# Altium PCB Final_handPCB_2022-03-14.pcbdoc
Units mil, origin at the board's own origin, x right, y up, seen from the top; angles counter-clockwise.
Board outline 4490 x 3865 mil, 2 copper layers (Top Layer, Bottom Layer); 36 components, 34 nets, 147 pads, 52 vias.
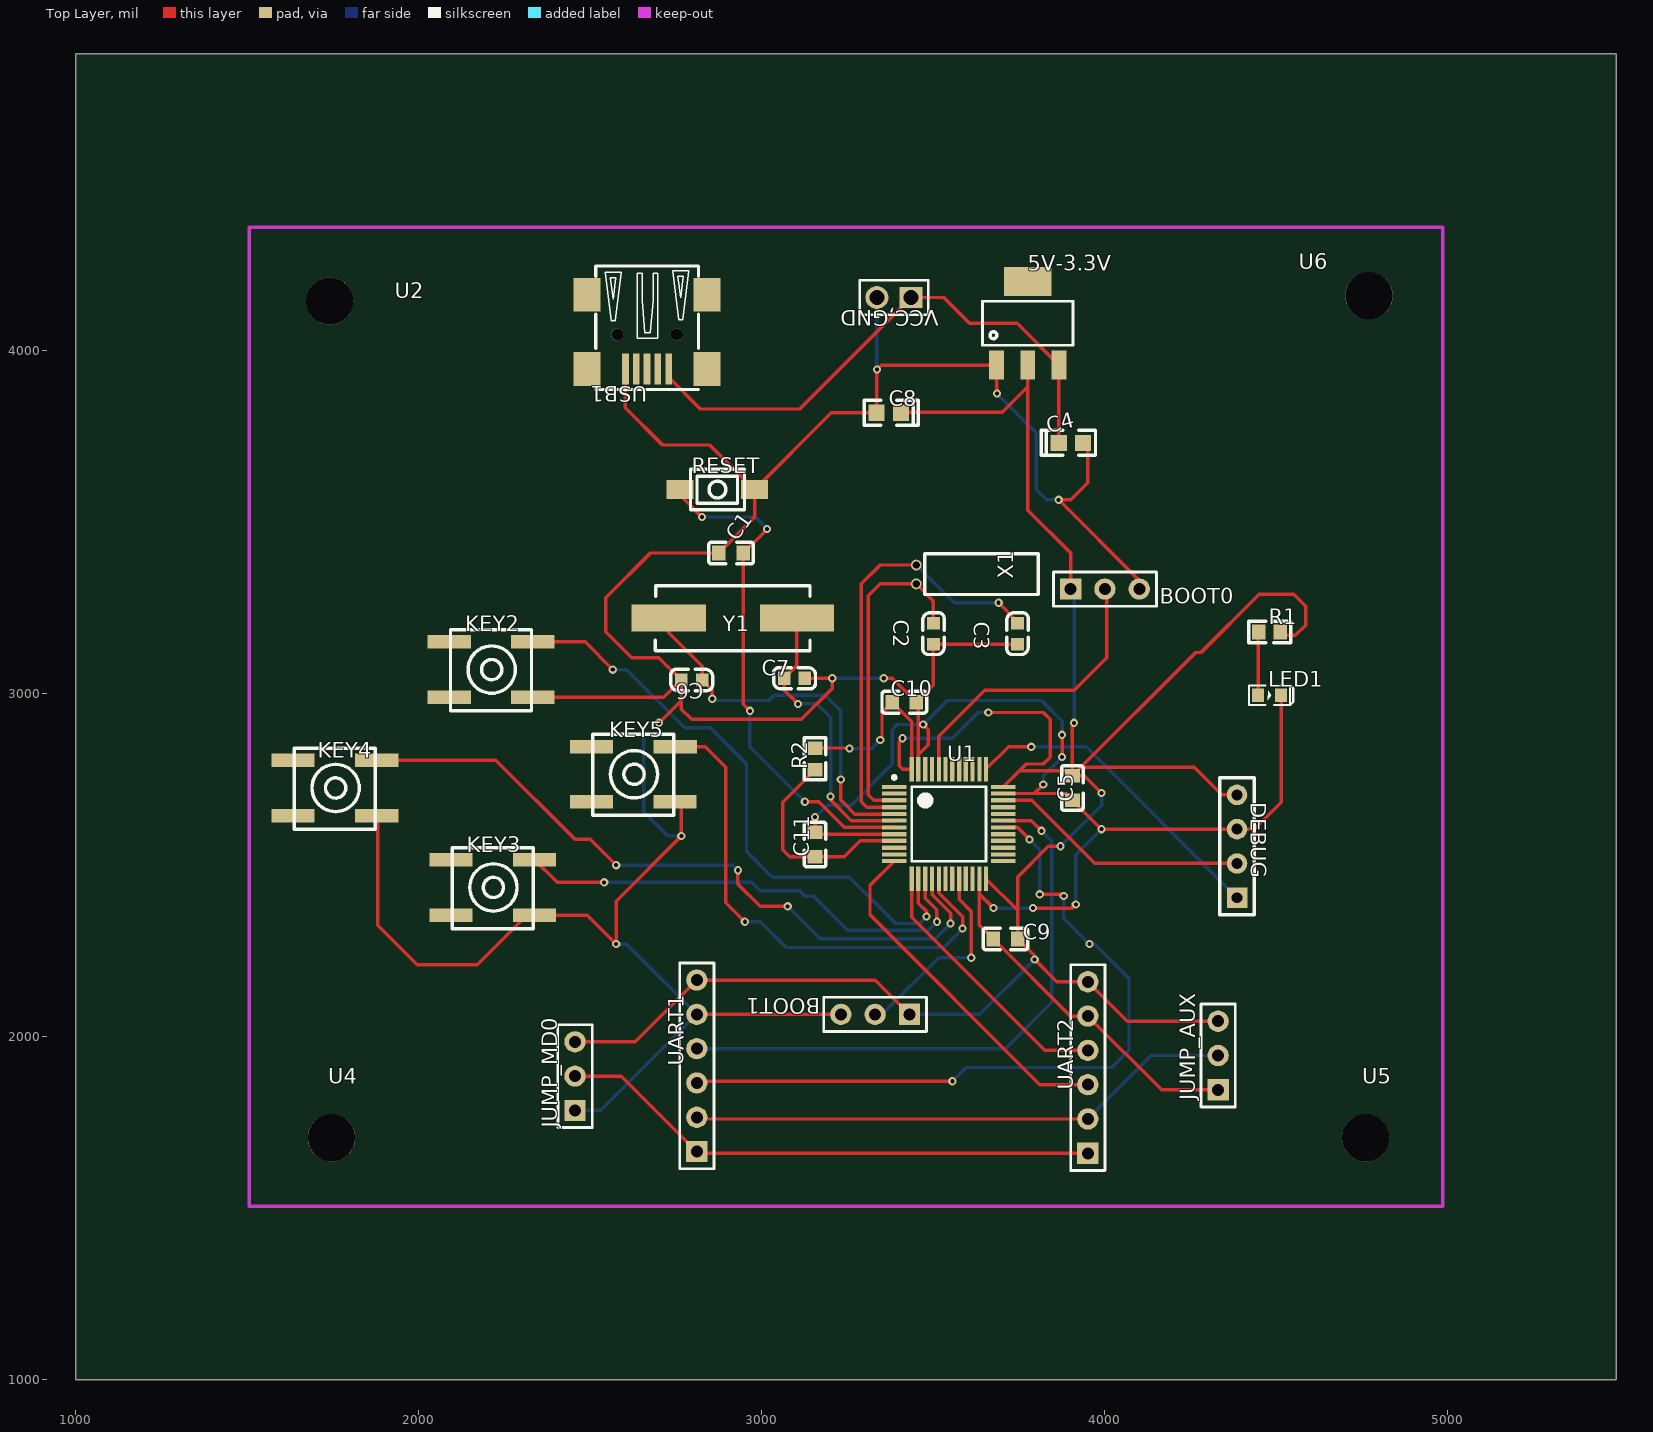
[diagram p0: Top Layer view]
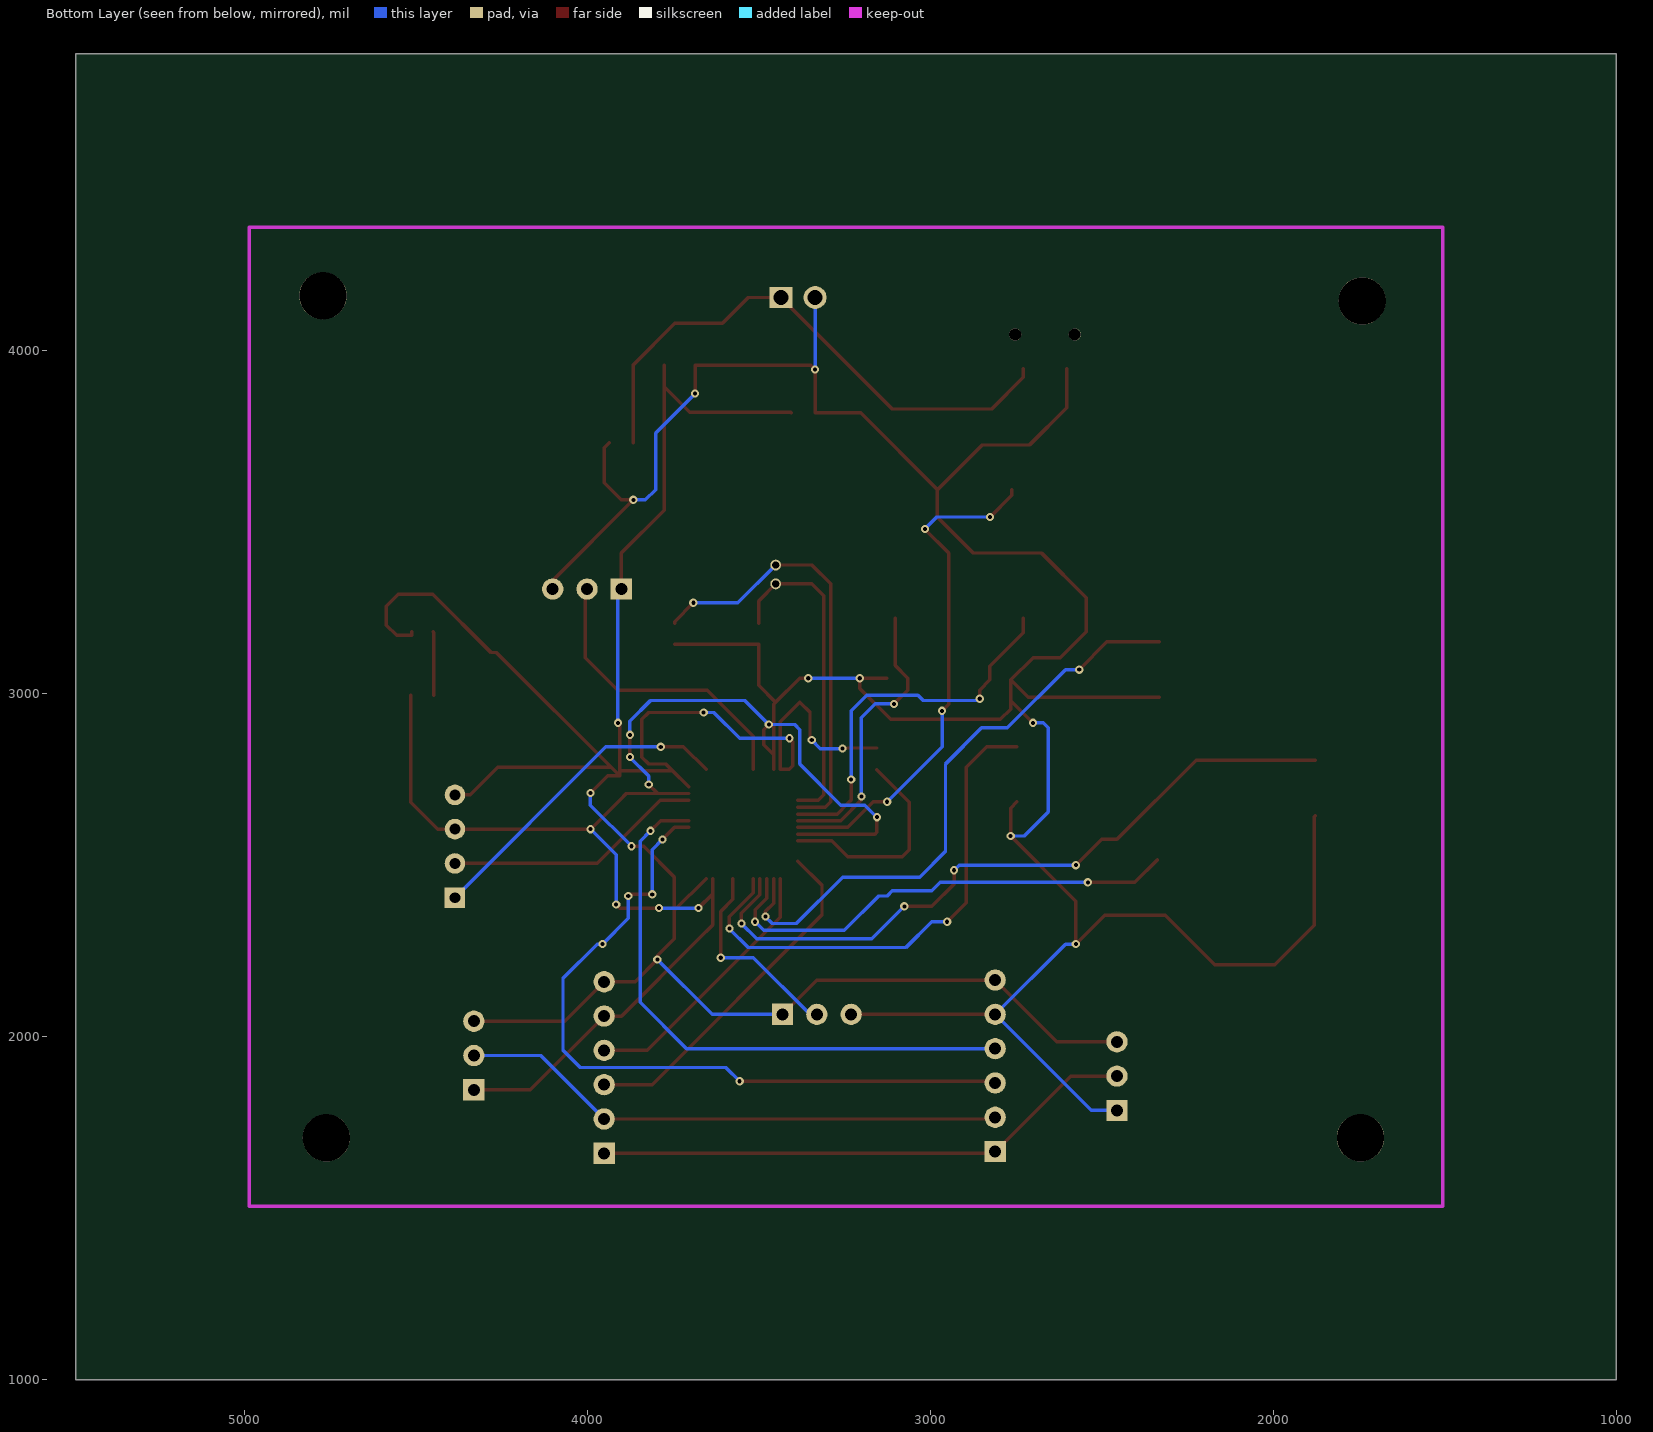
[diagram p1: Bottom Layer view, seen from below]

## Layer stack, top to bottom
Top Layer: signal copper (thickness not stored)
Dielectric: dielectric 12.6, FR-4, Dk 4.8
Bottom Layer: signal copper (thickness not stored)

## Board outline
5490,1000 1000,1000 1000,4865 5490,4865

## Components (designator, comment, footprint, x,y, rotation, side; value= is the part's Value field where it differs from the comment)
5V-3.3V "ASM1117-3.3" ASM1117-5.0-SOT223 3775,4075 r0 top
BOOT0 "HDR-M-2.54_1x3" HDR-M-2.54_1X3 4000,3305 r0 top
BOOT1 "HDR-M-2.54_1x3" HDR-M-2.54_1X3 3330,2065 r180 top
C1 "100nf" C0603 2910,3410 r0 top
C2 "8pF/50V" 0603_C_JX 3500,3175 r270 top
C3 "8pF/50V" 0603_C_JX 3745,3175 r270 top
C4 "10uF" CASE-R_2012 3900,3730 r180 top
C5 "100nf" C0603 3905,2725 r90 top
C6 "22pF/50V" 0603_C_JX 2795,3040 r180 top
C7 "22pF/50V" 0603_C_JX 3095,3045 r0 top
C8 "10uF" CASE-R_2012 3370,3820 r0 top
C9 "100nf" C0603 3710,2285 r180 top
C10 "100nf" C0603 3415,2975 r180 top
C11 "100nf" C0603 3155,2560 r90 top
DEBUG "M_2.54_1*4P_JX" M_2.54_1*4P_JX 4385,2555 r90 top
JUMP_AUX "HDR-M-2.54_1x3" HDR-M-2.54_1X3 4330,1945 r90 top
JUMP_MD0 "HDR-M-2.54_1x3" HDR-M-2.54_1X3 2455,1885 r90 top
KEY2 "B3SL-1022P贴片开关" KEY-6.5*6.2 2210,3070 r180 top
KEY3 "B3SL-1022P贴片开关" KEY-6.5*6.2 2215,2435 r180 top
KEY4 "B3SL-1022P贴片开关" KEY-6.5*6.2 1755,2725 r180 top
KEY5 "B3SL-1022P贴片开关" KEY-6.5*6.2 2625,2765 r180 top
LED1 "LED-0603_R" LED0603_RED 4480,2995 r0 top
R1 "10k" R0603 4480,3180 r0 top
R2 "0" R0603 3155,2810 r90 top
RESET "Switch" KEY-3.0*4.0 2870,3595 r180 top
U1 "stm32c8t6" 48LQFP 3545,2620 r0 top
U2 "M3" M3 1740,4145 r0 top
U4 "M3" M3 1745,1705 r0 top
U5 "M3" M3 4760,1705 r0 top
U6 "M3" M3 4770,4160 r0 top
UART1 "HDR-F-2.54_1x6" HDR-F-2.54_1X6 2810,1865 r90 top
UART2 "HDR-F-2.54_1x6" HDR-F-2.54_1X6 3950,1860 r90 top
USB1 "USB-MINI-SMD-9.2X9.4-H3.7" MINI-USB-SMD_C105424 2665,4055 r180 top
VCC,GND "HDR-M-2.54_1x2" HDR-M-2.54_1X2 3385,4155 r180 top
X1 "32.7K" 32.768 3665,3335 r0 top
Y1 "8MHZ/20pF" HC-49SMD_JX 2915,3220 r0 top

## Footprints (in the part's own frame and the unit in brackets; to place one, negate y for a bottom-side part, rotate by r counter-clockwise, add the part's x,y. Pads: shape width x height; smd on the part's side, far side on the other; paste and mask are expansions set on the pad)
32.768 [mil]
  round 31.5 hole 19.68 slot 19.88 at 90 deg: 1(-215,-15) 2(-215,40)
  silkscreen extent -190,-46 141,73
48LQFP [mil]
  rect 71.5x12.5 smd: 1(-159,108) 2(-159,89) 3(-159,69) 4(-159,49) 5(-159,29) 6(-159,10) 7(-159,-10) 8(-159,-30) 9(-159,-49) 10(-159,-69) 11(-159,-89) 12(-159,-108) 25(159,-108) 26(159,-89) 27(159,-69) 28(159,-49) 29(159,-30) 30(159,-10) 31(159,10) 32(159,29) 33(159,49) 34(159,69) 35(159,89) 36(159,108)
  rect 12.5x71.5 smd: 13(-108,-159) 14(-89,-159) 15(-69,-159) 16(-49,-159) 17(-29,-159) 18(-10,-159) 19(10,-159) 20(30,-159) 21(49,-159) 22(69,-159) 23(89,-159) 24(108,-159) 37(108,159) 38(89,159) 39(69,159) 40(49,159) 41(30,159) 42(10,159) 43(-10,159) 44(-29,159) 45(-49,159) 46(-69,159) 47(-89,159) 48(-108,159)
  silkscreen extent -164,-108 108,141
0603_C_JX [mil]
  rect 36.61x38.58 smd: 1(-30.31,-0.21) 2(30.38,-0.01)
  silkscreen extent -61,-31 61,31
ASM1117-5.0-SOT223 [mil]
  rect 43x85 smd: 1(-91,-117) 2(0,-117) 3(91,-117)
  rect 138x85 smd: 4(0,127)
  silkscreen extent -132,-59 132,69
C0603 [mm]
  rect 1x1.1 smd: 1(-0.9,0) 2(0.9,0)
  silkscreen extent -1.65,-0.8 1.65,0.8
CASE-R_2012 [mm]
  rect 1.2x1.2 smd: 1(0.889,-0.025) 2(-0.909,-0.025)
  silkscreen extent -1.84,-0.95 2.19,0.9
HC-49SMD_JX [mm]
  rect 5.5x2 smd: 1(-4.75,0) 2(4.75,0)
  silkscreen extent -5.74,-2.4 5.71,2.4
HDR-F-2.54_1X6 [mil]
  rect 62x62 hole 35: 1(-200,0)
  round 62 hole 35: 2(-100,0) 3(0,0) 4(100,0) 5(200,0) 6(300,0)
  silkscreen extent -250,-50 350,50
HDR-M-2.54_1X2 [mm]
  rect 1.7x1.575 hole 1.1: 1(-1.27,0)
  round 1.7 hole 1.1: 2(1.27,0)
  silkscreen extent -2.54,-1.27 2.54,1.27
HDR-M-2.54_1X3 [mil]
  rect 62x62 hole 35: 1(-100,0)
  round 62 hole 35: 2(0,0) 3(100,0)
  silkscreen extent -150,-50 150,50
KEY-3.0*4.0 [mm]
  rect 2x1.4 smd: 1(-2.752,0.001) 2(2.752,-0.001)
  silkscreen extent -2.01,-1.5 1.99,1.5
KEY-6.5*6.2 [mm]
  rect 3.2x1 smd: 1(3.096,-2.052) 2(-3.097,-2.051) 3(3.097,2.052) 4(-3.095,2.048)
  silkscreen extent -3,-2.95 3,3.05
LED0603_RED [mm]
  rect 0.9x1 smd: 1(-0.85,0) 2(0.85,0)
  silkscreen extent -1.54,-0.73 1.75,0.73
M3 [mm]
  round 3.5 hole 3.5 unplated: ""(0,0)
  Top Layer pour cut-out: 0,-4.08 2.04,-3.533 3.533,-2.039 4.079,0.001 3.532,2.04 2.039,3.533 -0.001,4.08 -2.041,3.533 -3.534,2.04 -4.081,0.001 -3.535,-2.039 -2.042,-3.533 -0.003,-4.08 -0.003,-4.08 -0.003,-4.08 0,-4.08
  Bottom Layer pour cut-out: 0,-4.064 2.04,-3.517 3.533,-2.023 4.079,0.017 3.532,2.056 2.039,3.549 -0.001,4.096 -2.041,3.549 -3.534,2.056 -4.081,0.017 -3.535,-2.023 -2.042,-3.517 -0.003,-4.064 -0.003,-4.064 -0.003,-4.064 0,-4.064
M_2.54_1*4P_JX [mm]
  rect 1.52x1.52 hole 0.81: 1(-3.81,0)
  round 1.52 hole 0.81: 2(-1.27,0) 3(1.27,0) 4(3.81,0)
  silkscreen extent -5.08,-1.27 5.08,1.27
MINI-USB-SMD_C105424 [mm]
  rect 0.5x2.3 smd: 1(-1.6,2.75) 2(-0.8,2.75) 3(0,2.75) 4(0.8,2.75) 5(1.6,2.75)
  rect 2x2.5 smd: 6(4.45,2.75) 7(4.45,-2.75) 8(-4.45,2.75) 9(-4.45,-2.75)
  round 0.9 hole 0.9 unplated: ""(-2.2,0.2) ""(2.2,0.2)
  silkscreen extent -3.81,-4.87 3.81,4.27
R0603 [mm]
  rect 1x1.1 smd: 1(-0.8,0) 2(0.8,0)
  silkscreen extent -1.55,-0.8 1.55,0.81

## Via types
v1: diameter 24, hole 12, Top Layer to Bottom Layer, tented both sides, 52 vias

## Nets (pads, with @x,y where several pads share a name; then routed paths per layer and width w, separated by ;. In a path a pad name is that pad's centre, name@x,y a point inside that pad or via, vN(x,y) a via of type N, cw(c..) or ccw(c..) an arc to the next point about the centre after c; other vN are vias at no path point)
3.3V: 5V-3.3V.2 BOOT0.1 BOOT1.1 C5.2 C8.1 C9.1 C10.2 DEBUG.4 JUMP_AUX.3 JUMP_MD0.3 R1.2 R2.2 U1.24 U1.36 U1.48 UART1.6 UART2.6 | length 8030.5
  Top Layer w10: JUMP_MD0.3 2630,1985 UART1.6 3330,2165 BOOT1.1 ; R2.2 3253.51,2841.49 v1(3255,2840) ; v1(3345,2865) 3350,2865 3350,2945.43 C10.2 3437,2917.57 U1.48 3411,2779 3400,2790 3400,2860 v1(3410,2870) ; C8.1 3406,3820 3700,3820 3775,3895 5V-3.3V.2 3775,3535 3900,3410 BOOT0.1 ; U1.24 3745.43,2368.57 C9.1 ; v1(3660,2945) 3820,2945 3840,2925 3840,2815 3820,2795 3771,2795 U1.36 3751,2775 3905,2775 C5.2 ; v1(3870,2555) 3835,2555 3745.43,2465.43 C9.1 ; v1(3910,2915) 3905,2910 C5.2 ; C5.2@3921.2,2776.7 4264.6,3120 4280,3120 4450,3290 4550,3290 4585,3255 4585,3200 4555,3170 4511.5,3170 R1.2 ; v1(3990,2710) 3939.57,2760.43 C5.2 ; JUMP_AUX.3 4065,2045 UART2.6 3860,2160 v1(3795,2225) 3795,2235.43 C9.1 ; DEBUG.4 4340,2705 4260,2785 3929.57,2785 C5.2
  Bottom Layer w10: v1(3255,2840) 3320,2840 v1(3345,2865) ; v1(3410,2870) 3555,2870 3630,2945 v1(3660,2945) ; BOOT1.1 3635,2065 v1(3795,2225) ; v1(3870,2555) 3990,2675 v1(3990,2710) ; BOOT0.1@3900,3310.89 3910,3300.89 v1(3910,2915)
5V: 5V-3.3V.3 C4.1 USB1.1 VCC,GND.1 | length 1644.4
  Top Layer w10: USB1.1 2728,3922 2820,3830 3110,3830 3435,4155 3530,4155 3605,4080 3744,4080 5V-3.3V.3 3865,3957 C4.1
AUX: JUMP_AUX.2 UART1.2 UART2.2 | length 1598.7
  Top Layer w10: UART1.2 2815,1760 UART2.2
  Bottom Layer w10: UART2.2 4135,1945 JUMP_AUX.2
BACK: KEY3.2 U1.15 | length 1408.7
  Top Layer w10: KEY3.2 2402.7,2450 v1(2540,2450) ; U1.15 3476,2404 3510,2370 v1(3510,2335)
  Bottom Layer w10: v1(2540,2450) 2970,2450 2995,2425 3110,2425 3125,2410 3150,2410 3250,2310 3485,2310 v1(3510,2335)
BOOT0: BOOT0.2 U1.44 | length 885.9
  Top Layer w10: U1.44 3516,2876 3650,3010 3910,3010 4005,3105 4005,3305 BOOT0.2
BOOT1: BOOT1.2 U1.20 | length 593.8
  Top Layer w10: U1.20 3575,2400 3610,2365 v1(3610,2230)
  Bottom Layer w10: BOOT1.2 3350,2065 3515,2230 v1(3610,2230)
FORWARD: KEY2.2 U1.14 | length 1766.6
  Top Layer w10: KEY2.2 2484.24,3150.76 v1(2565,3070) ; U1.14 3456,2389 3480,2365 v1(3480,2350)
  Bottom Layer w10: v1(2565,3070) 2605,3070 2775,2900 2850,2900 2955,2795 2955,2540 3030,2465 3255,2465 3390,2330 3460,2330 v1(3480,2350)
GND: 5V-3.3V.1 BOOT0.3 BOOT1.3 C1.1 C2.2 C3.2 C4.2 C5.1 C6.2 C7.2 C8.2 C9.2 C10.1 C11.2 DEBUG.3 JUMP_AUX.1 JUMP_MD0.1 KEY2.4 KEY3.4 KEY4.4 KEY5.4 LED1.2 RESET.1 U1.8 U1.23 U1.35 U1.47 UART1.5 UART2.5 USB1.5 VCC,GND.2 | length 13823.5
  Top Layer w10: KEY4.4 1880,2641.2 1880,2325 1995,2210 2170,2210 2314.4,2354.4 KEY3.4 ; KEY2.4 2713.99,2989.39 C6.2 ; KEY3.4 2490.61,2354.39 v1(2575,2270) 2575,2395 v1(2765,2585) 2765,2666.23 KEY5.4 ; USB1.5 2602.01,3832.99 2710,3725 2848.3,3725 RESET.1 ; v1(2700,2915) 2764.62,2979.62 C6.2 ; UART1.5 BOOT1.3 ; C7.2 v1(3205,3045) 3205,3015 3115,2925 2795,2925 2765,2955 C6.2 ; v1(3155,2640) C11.2 3160.43,2590 U1.8 ; v1(3355,3045) 3380.43,3045 C10.1 ; v1(3470,2910) 3485,2895 3485,2851.41 3456,2822.41 U1.47 3456,2969.43 C10.1 ; v1(3675,2375) 3634,2416 U1.23 3634,2325.57 C9.2 3899.57,2060 UART2.5 4165,1845 JUMP_AUX.1 ; v1(3685,3875) 3685,3957 5V-3.3V.1 3348,3958 v1(3335,3945) C8.2 3202.38,3819 RESET.1 ; C3.2 C2.2 3499.99,3024.55 C10.1 ; v1(3790,2375) 3905,2375 v1(3915,2385) ; v1(3820,2735) 3794,2709 U1.35 3885.57,2709 C5.1 v1(3989.57,2605) DEBUG.3 4435,2605 4513.5,2683.5 LED1.2 ; v1(3875,2815) v1(3875,2880) ; C4.2 3950,3716.8 3950,3615 3900,3565 v1(3865,3565) 4100,3330 BOOT0.3 ; C6.2 2699.63,3105 2620,3105 2545,3180 2545,3280 2675,3410 C1.1 2978.34,3513.78 RESET.1
  Bottom Layer w10: JUMP_MD0.1 2530,1785 UART1.5 2605,2270 v1(2575,2270) ; v1(2700,2915) 2670,2915 2655,2900 2655,2655 2725,2585 v1(2765,2585) ; v1(3155,2640) 3190,2675 3260,2675 3380,2795 3380,2895 3395,2910 v1(3470,2910) 3540,2980 3815,2980 3875,2920 v1(3875,2880) ; v1(3205,3045) v1(3355,3045) ; v1(3335,3945) 3335,4155 ; v1(3675,2375) v1(3790,2375) ; v1(3685,3875) 3800,3760 3800,3595 3830,3565 v1(3865,3565) ; v1(3820,2735) 3820,2760 v1(3875,2815) ; v1(3915,2385) 3915,2450 3915,2530.43 v1(3989.57,2605)
LED1_1: LED1.1 R1.1 | length 185.8
  Top Layer w10: LED1.1 4446.53,3178.03 R1.1
LEFT: KEY4.2 U1.16 | length 2084.3
  Top Layer w10: KEY4.2 2154.24,2805.76 ; 2154.2,2805.8 2224.2,2805.8 2455,2575 2500,2575 v1(2575,2500) ; v1(2930,2485) 2930,2445 2995,2380 v1(3075,2380) ; U1.16 3496,2414 3550,2360 v1(3550,2330)
  Bottom Layer w10: v1(2575,2500) 2915,2500 v1(2930,2485) ; v1(3075,2380) 3170,2285 3505,2285 v1(3550,2330)
MD0: JUMP_MD0.2 UART1.1 UART2.1 | length 1588.2
  Top Layer w10: JUMP_MD0.2 2590,1885 UART1.1 2815,1660 UART2.1
OC32IN: C2.1 U1.3 X1.1 | length 952.4
  Top Layer w10: U1.3 3326,2689 3310,2705 3310,3285 3345,3320 X1.1 3499.79,3270.21 C2.1
OC32OUT: C3.1 U1.4 X1.2 | length 1288.4
  Top Layer w10: U1.4 3306,2669 3290,2685 3290,3320 3345,3375 X1.2 ; v1(3690,3265) 3744.79,3210.21 C3.1
  Bottom Layer w10: X1.2 3560,3265 v1(3690,3265)
OCIN: C6.1 U1.5 Y1.1 | length 1125.4
  Top Layer w10: Y1.1 2728,3177 2825.3,3079.7 C6.1 2855,3010.52 v1(2855,2985) ; v1(3230,2750) 3230,2690 3240,2680 3271,2649 U1.5
  Bottom Layer w10: v1(2855,2985) 2855,2980 3020,2980 3035,2995 3185,2995 3230,2950 v1(3230,2750)
OCOUT: C7.1 U1.6 Y1.2 | length 844.6
  Top Layer w10: Y1.2 3102.01,3082.11 C7.1 3064.69,3010.31 v1(3105,2970) ; v1(3200,2700) 3200,2690 3260,2630 U1.6
  Bottom Layer w10: v1(3105,2970) 3160,2970 3200,2930 v1(3200,2700)
RESET: C1.2 RESET.2 U1.7 | length 1501
  Top Layer w10: RESET.2 2761.66,3578.34 v1(2825,3515) ; v1(2965,2950) 2945.43,2969.57 C1.2 3015,3479.57 v1(3015,3480) ; v1(3125,2685) 3165,2685 3240,2610 U1.7
  Bottom Layer w10: v1(2825,3515) 2980,3515 v1(3015,3480) ; v1(2965,2950) 2965,2845 v1(3125,2685)
RIGHT: KEY5.2 U1.17 | length 1509.4
  Top Layer w10: KEY5.2 2834.24,2845.76 2895,2785 2895,2390 v1(2950,2335) ; U1.17 3516,2419 3585,2350 v1(3585,2315)
  Bottom Layer w10: v1(2950,2335) 2995,2335 3070,2260 3530,2260 v1(3585,2315)
RX1: U1.31 UART1.4 | length 1726.8
  Top Layer w10: U1.31 3785,2630 v1(3815,2600)
  Bottom Layer w10: UART1.4 3710,1965 3845,2100 3845,2570 v1(3815,2600)
RX2: U1.13 UART2.4 | length 786.7
  Top Layer w10: U1.13 3437,2348 3825,1960 UART2.4
S$11: 
S$35: 
S$43: 
SWCLK: DEBUG.1 U1.37 | length 941.6
  Top Layer w10: U1.37 3719,2845 v1(3785,2845)
  Bottom Layer w10: v1(3785,2845) 3945,2845 DEBUG.1
SWDIO: DEBUG.2 U1.34 | length 757.2
  Top Layer w10: U1.34 3786,2689 3970,2505 DEBUG.2
TX1: U1.30 UART1.3 | length 2171.8
  Top Layer w10: UART1.3 2815,1870 v1(3555,1870) ; U1.30 3745,2610 v1(3780,2575) ; v1(3810,2415) 3875,2415 v1(3880,2410)
  Bottom Layer w10: v1(3555,1870) 3595,1910 4020,1910 4070,1960 4070,2170 3970,2270 v1(3955,2270) 3880,2345 v1(3880,2410) ; v1(3780,2575) 3810,2545 v1(3810,2415)
TX2: U1.12 UART2.3 | length 1026.4
  Top Layer w10: U1.12 3315,2441 3315,2355 3810,1860 UART2.3
U1_9: C11.1 R2.1 U1.9 | length 626.6
  Top Layer w10: R2.1 3060,2683.5 3060,2545 3080.43,2524.57 C11.1 3239.57,2524.57 3286,2571 U1.9
USB1_2: USB1.2
USB1_3: USB1.3
USB1_4: USB1.4
USB1_6: USB1.6
USB1_7: USB1.7
USB1_8: USB1.8
USB1_9: USB1.9
pads on no net: 5V-3.3V.4 KEY2.1 KEY2.3 KEY3.1 KEY3.3 KEY4.1 KEY4.3 KEY5.1 KEY5.3 U1.1 U1.2 U1.10 U1.11 U1.18 U1.19 U1.21 U1.22 U1.25 U1.26 U1.27 U1.28 U1.29 U1.32 U1.33 U1.38 U1.39 U1.40 U1.41 U1.42 U1.43 U1.45 U1.46 U2. U4. U5. U6. USB1.

## Silkscreen, mask and mechanical layers (free items; w line width, h text height)
Document:
  lines w0.1: 3244.99,2932.49 3245.01,2932.51